# Altium PCB 主板-双BH(1).PcbDoc (part 1 of 13)
Units mm, origin at the board's own origin, x right, y up, seen from the top; angles counter-clockwise.
Board outline 97.69 x 103.45 mm, 2 copper layers (Top Layer, Bottom Layer); 78 components, 75 nets, 243 pads, 279 vias.
Unrouted connection lines stored in the file: 7.
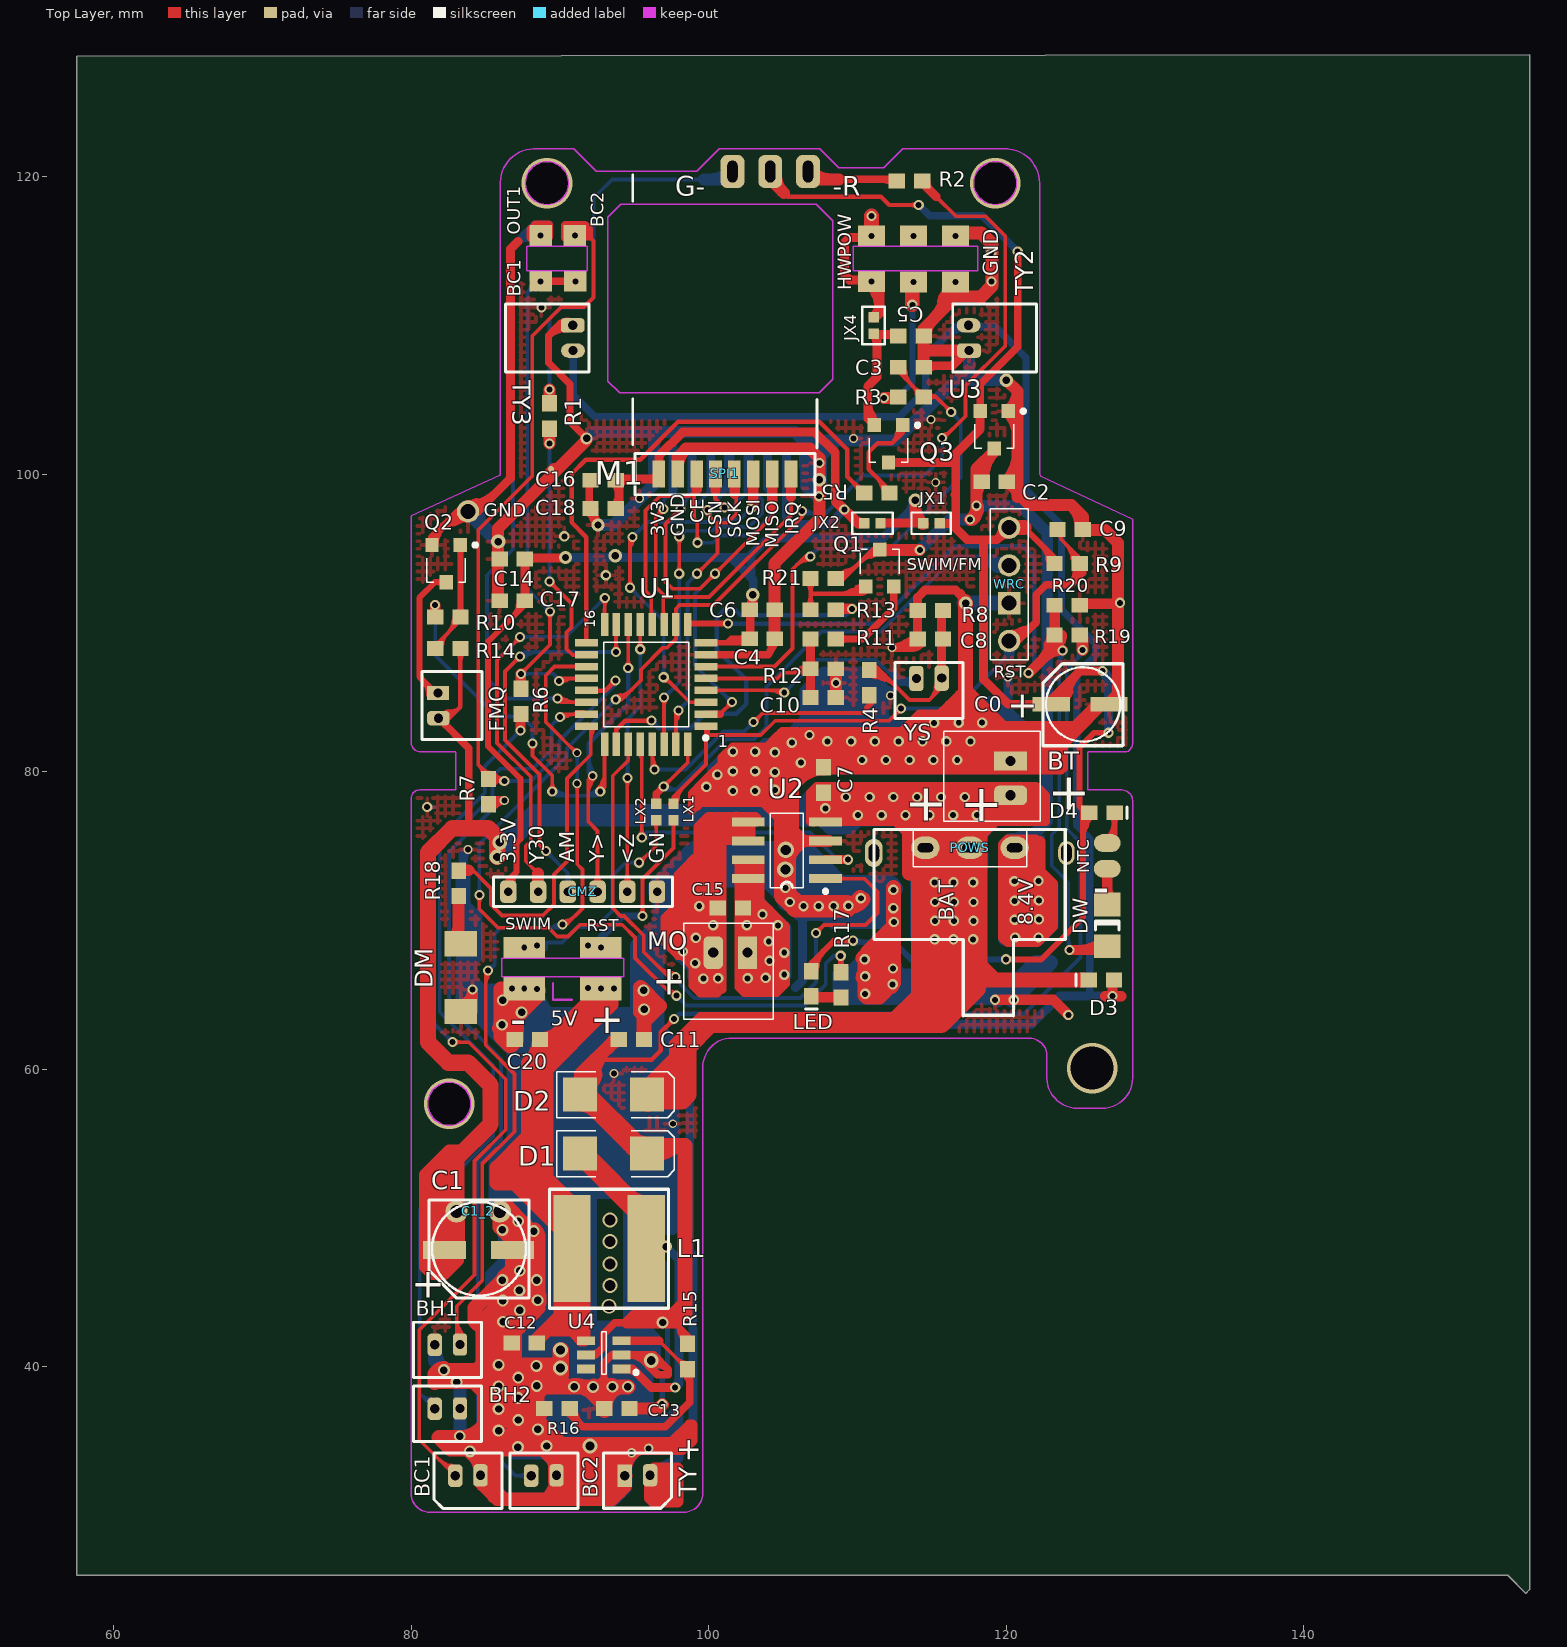
[diagram p0: Top Layer view]
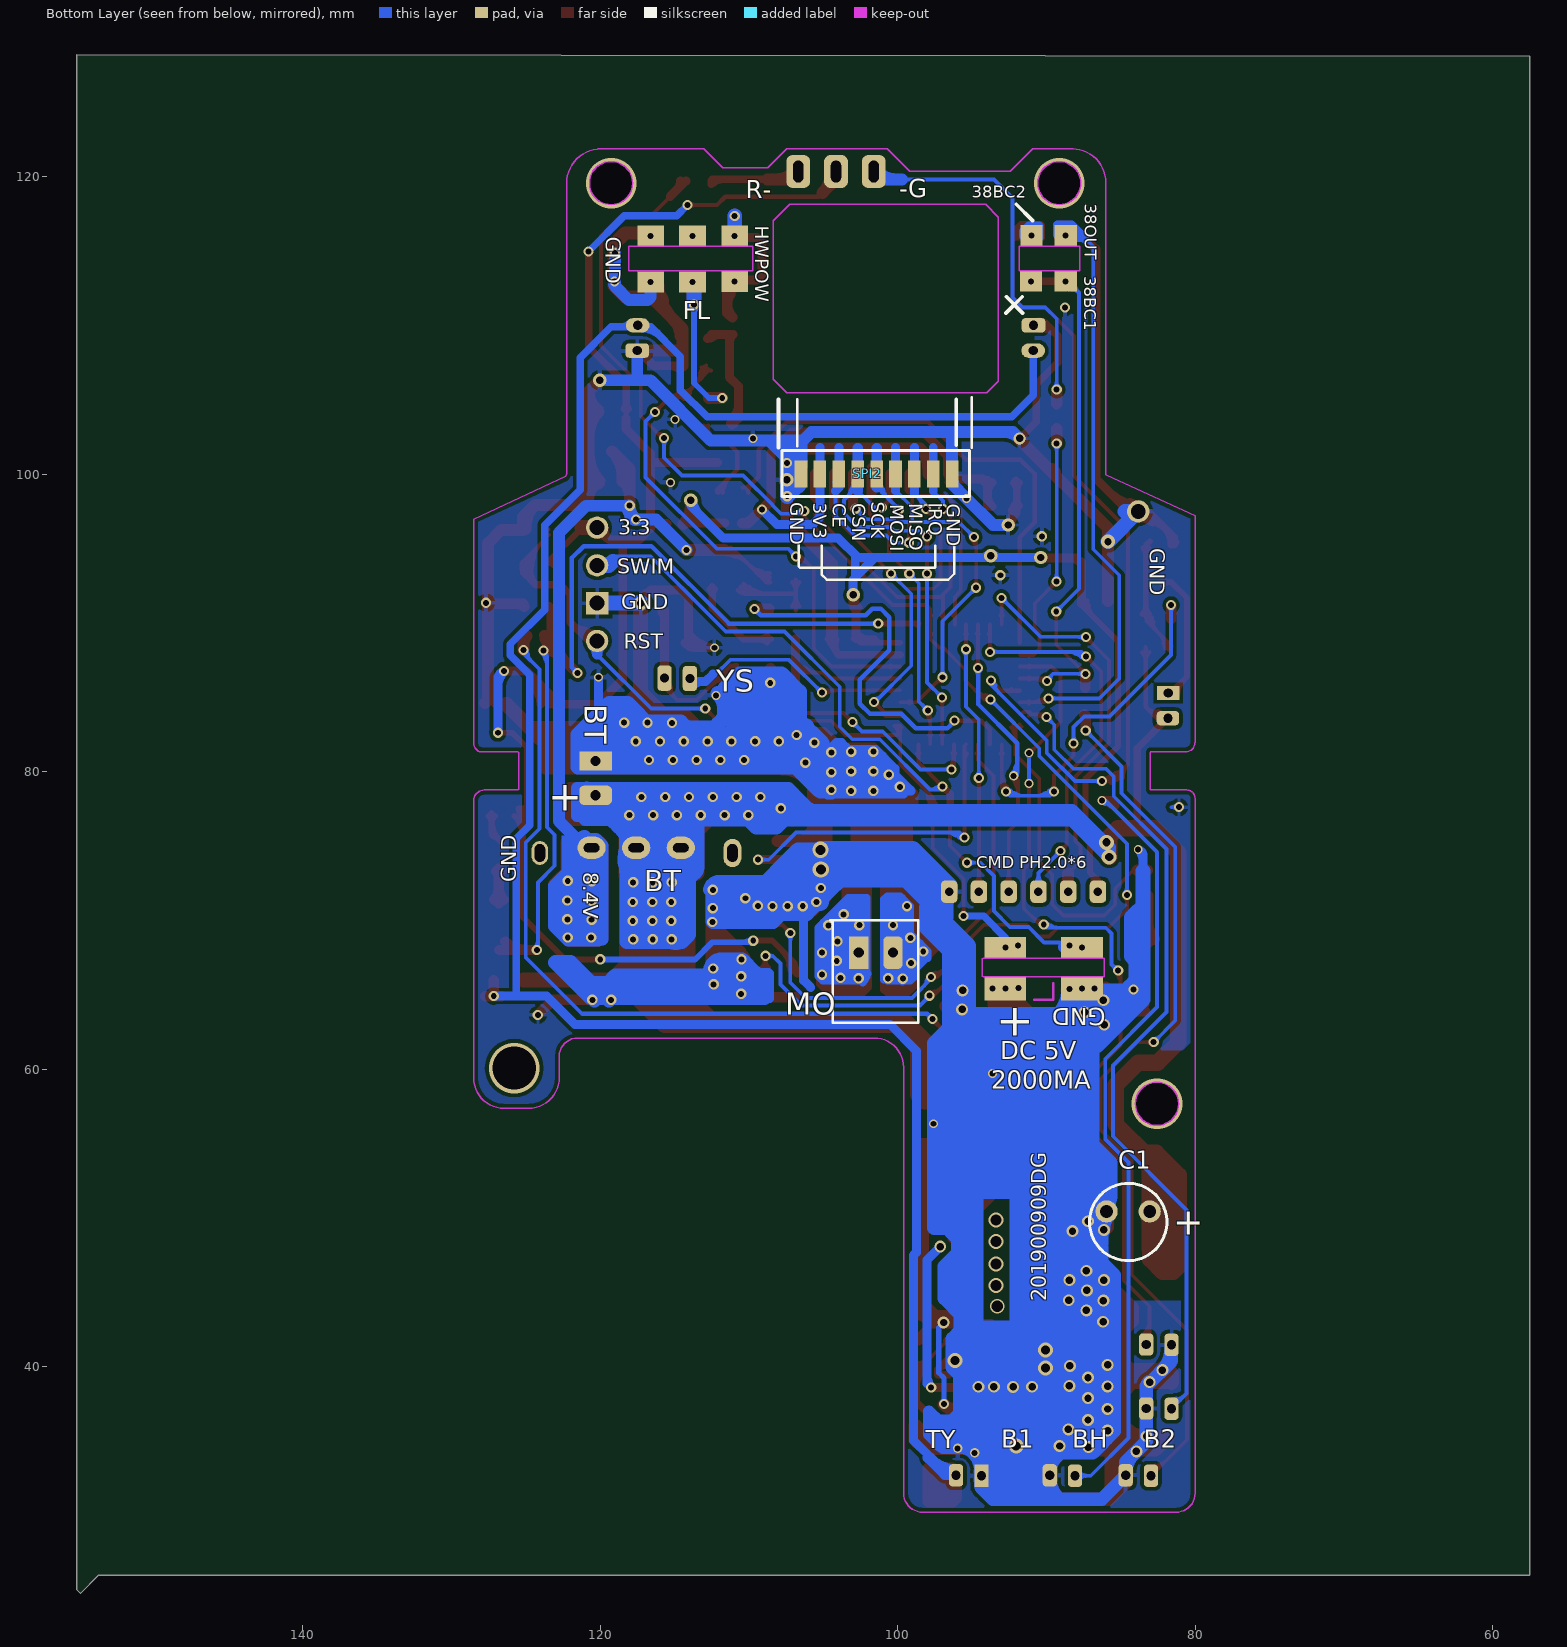
[diagram p1: Bottom Layer view, seen from below]

## Layer stack, top to bottom
Top Layer: signal copper 0.0356
Dielectric: dielectric 0.32, FR-4, Dk 4.8
Bottom Layer: signal copper 0.0356

## Board outline
57.506,128.118 57.506,25.984 153.721,25.984 154.94,24.765 155.194,25.019 155.194,128.219

## Design rules (kind name [scope] priority, off if disabled: settings)
Clearance [All] p1: gap=0.254
PolygonConnect [All] p1: connectstyle=Relief reliefconductorwidth=0.254 reliefentries=4 polygonreliefangle="90 Angle"
RoutingVias [All] p1: holewidth=0.711 width=1.27 viastyle="Through Hole" minholewidth=0.711 minwidth=1.27 maxholewidth=0.711 maxwidth=1.27
SilkscreenOverComponentPads [All] p1: minsilkscreentomaskgap=0.254
SolderMaskExpansion [All] p1: expansion=0.102
Width [All] p1: maxlimit=2 minlimit=0.254 preferedwidth=0.254 minimp=50.000000 maximp=50.000000 favimp=50.000000
27 further rules are at their usual default settings.

## Components (designator, comment, footprint, x,y, rotation, side; value= is the part's Value field where it differs from the comment)
BC1 "1.5*2P" MHDR1X2#1 84.5,32.7 r180 top locked (schematic designator BT)
BC2 "1.5*2P" MHDR1X2#1 89.6,32.7 r180 top locked (schematic designator BT)
BH1 "1.5*2P" MHDR1X2#1 83.12,41.5 r180 top locked (schematic designator BT)
BH2 "1.5*2P" MHDR1X2#1 83.12,37.2 r180 top locked (schematic designator BT)
BT "PH2.0-W" HDR1X2#1 120.3,78.032 r90 top locked
C0 "47uf  5*5.8" CC3216-1206#1 123.7,84.932 r0 top locked
C1 "220UF" CC3216-1206#2 85.3,47.39 r180 top locked
C1_2 "" HDR1X2#2 76.987,51 r180 top locked
C2 "0.1uf" CR1608-0603#1 119.2,99.5 r180 top locked
C3 "0.01uf" CR1608-0603#1 113.6,107.2 r180 top locked
C4 "0.1uf" CR1608-0603#1 103.6,88.951 r0 top locked (schematic designator C6)
C5 "10uf" CR1608-0603#1 113.6,109.3 r180 top locked (schematic designator C2)
C6 "0.01uf" CR1608-0603#1 103.6,90.9 r180 top locked (schematic designator C7)
C7 "0.1uf" CR1608-0603#1 107.723,79.45 r270 top locked (schematic designator C11)
C8 "0.01uf" CR1608-0603#1 114.9,88.932 r0 top locked
C9 "0.1uf" CR1608-0603#1 124.3,96.3 r180 top locked
C10 "0.01uf" CR1608-0603#1 107.7,85 r0 top locked (schematic designator R11)
C11 "10uf" CR1608-0603#1 94.8,62 r0 top locked
C12 "10uf" CR1608-0603#1 87.6,41.6 r180 top locked
C13 "1uf" CR1608-0603#1 93.83,37.2 r180 top locked
C14 "10uf" CR1608-0603#1 86.792,94.3 r180 top locked (schematic designator R6)
C15 "0.1uf" CR1608-0603#1 101.46,70.85 r0 top locked (schematic designator C4)
C16 "0.1uf" CR1608-0603#1 92.9,99.6 r0 top locked (schematic designator C4)
C17 "10uf" CR1608-0603#1 86.792,91.5 r180 top locked (schematic designator R6)
C18 "0.01uf" CR1608-0603#1 92.9,97.7 r0 top locked (schematic designator C4)
C20 "10uf" CR1608-0603#1 87.808,62 r0 top locked
CMZ "CMD PH2.0*6" MHDR1X7 94.15,71.944 r180 top locked
D1 "SS24" DSO-C2/X2.3 93.6,54.33 r0 top locked
D2 "SS24" DSO-C2/X2.3 93.6,58.3 r0 top locked (schematic designator D3)
D3 "SS14" CC1608-0603 126.4,66 r0 top locked (schematic designator D8)
D4 "SS14" CC1608-0603 126.441,77.25 r180 top locked (schematic designator R4)
DM "3*4*2小龟按钮" HDR1X2#3 85.344,70.032 r90 top locked (schematic designator FW)
DW "WD" CC3216-1206#3 126.8,69.672 r270 top locked
FMQ "1.5*2P" MHDR1X2#2 81.8,85.141 r270 top locked (schematic designator BT)
JX1 "" CR1005-0402 114.986,96.7 r0 top locked (schematic designator R8)
JX2 "" CR1005-0402 111,96.7 r180 top locked
JX4 "" CR1005-0402 111.1,110 r90 top locked (schematic designator R8)
L1 "22UH" L7 93.3,47.94 r180 top locked
LED "LED-DM" CC1608-0603 106.9,65.75 r90 top locked
LX1 "4.7K" CR1005-0402 97.638,77.292 r90 top locked (schematic designator R8)
LX2 "4.7K" CR1005-0402 96.469,77.292 r90 top locked (schematic designator R8)
MO "PH2.0-W" HDR1X2#4 103,67.843 r180 top locked (schematic designator BT)
POWS "SS12F23" HDR1X3 120.114,74.892 r180 top locked (schematic designator WS)
Q1 "S8050" SO-G3/C2.5 111.5,93.7 r0 top locked
Q2 "S8550" SO-G3/C2.5 82.35,94 r180 top locked
Q3 "S8550" SO-G3/C2.5 112.09,102.057 r180 top locked (schematic designator U5)
R1 "1K" CR1608-0603#1 89.3,103.919 r270 top locked
R2 "1K" CR1608-0603#1 113.5,119.732 r0 top locked
R3 "1K" CR1608-0603#1 113.6,105.2 r180 top locked
R4 "1K" CR1608-0603#1 110.8,86 r270 top locked
R5 "10K" CR1608-0603#1 111.303,98.755 r180 top locked (schematic designator R7)
R6 "500K" CR1608-0603#1 87.375,84.734 r270 top locked
R7 "500K" CR1608-0603#1 85.2,78.664 r90 top locked (schematic designator R6)
R8 "1M" CR1608-0603#1 114.9,90.856 r180 top locked
R9 "10K" CR1608-0603#1 124.1,94 r180 top locked
R10 "1K" CR1608-0603#2 82.46,90.4 r180 top locked (schematic designator R7)
R11 "1M" CR1608-0603#1 107.7,88.932 r180 top locked (schematic designator C10)
R12 "500K" CR1608-0603#1 107.7,86.932 r180 top locked
R13 "22K" CR1608-0603#1 107.7,90.9 r0 top locked
R14 "10K" CR1608-0603#2 82.46,88.3 r180 top locked (schematic designator R7)
R15 "100K" CR1608-0603#1 98.577,40.691 r270 top locked
R16 "7.89K" CR1608-0603#1 89.8,37.2 r180 top locked
R17 "1K" CR1608-0603#1 108.9,65.681 r90 top locked (schematic designator R19)
R18 "10K" CR1608-0603#1 83.2,72.5 r90 top locked
R19 "10K" CR1608-0603#1 124.1,89.2 r180 top locked (schematic designator R9)
R20 "4.7K" CR1608-0603#1 124.1,91.2 r180 top locked
R21 "22K" CR1608-0603#1 107.7,93 r180 top locked
SPI1 "SI24R1" MHDR1X8 105.537,100.032 r180 top locked
SPI2 "NRF24RL01" MHDR1X8 97.6,100.032 r0 bottom locked
TY "1.5*2P" MHDR1X2#3 95.9,32.7 r180 top locked (schematic designator BT)
TY2 "1.5*2P" MHDR1X2#4 117.475,109.855 r270 top locked (schematic designator BT)
TY3 "1.5*2P" MHDR1X2#4 90.881,108.483 r90 top locked (schematic designator BT)
U1 "STM8L151K4T6" TQFP32 95.8,85.877 r180 top locked
U2 "MX380（RZ7889D）" SO8 105.254,74.722 r90 top locked
U3 "ME6209-V1RK" SO-G3/C2.5 119.2,103 r180 top locked (schematic designator U5)
U4 "SX1308   B6287K  B6286" SOT23-6_M 92.95,40.8 r180 top locked
WRC "2.54HP" HDR1X4 120.2,88.8 r90 top locked (schematic designator SX)
YS "1.5*2P" MHDR1X2#5 115.5,86.3 r180 top locked (schematic designator BT)

## Footprints (in the part's own frame and the unit in brackets; to place one, negate y for a bottom-side part, rotate by r counter-clockwise, add the part's x,y. Pads: shape width x height; smd on the part's side, far side on the other; paste and mask are expansions set on the pad)
CC1608-0603 [mm] "Chip Capacito"
  rect 1.1x1 smd: 1(-0.85,0) 2(0.85,0)
  silkscreen extent -1.7,-0.4 -1.7,0.4
CC3216-1206#1 [mm]
  rect 2.5x1 smd: 1(-0.662,-0.386) 2(3.213,-0.386)
CC3216-1206#2 [mm]
  rect 2.9x1.2 smd: 1(-1.5,-0.45) 2(3.068,-0.455)
CC3216-1206#3 [mm] "Chip Capacitor; Body 3.2 x 1.6 mm (L"
  rect 1.6x1.8 smd: 1(-1.4,0) 2(1.4,0)
  silkscreen extent -0.3,-0.8 0.3,0.8
CR1005-0402 [mm]
  rect 0.7x0.7 smd: 1(-0.55,0) 2(0.55,0)
CR1608-0603#1 [mm]
  rect 1.1x1 smd: 1(-0.85,0) 2(0.85,0)
CR1608-0603#2 [mm]
  rect 1.1x1 smd: 1(-0.85,0)
  rect 1.1x1 smd paste+0: 2(0.85,0)
DSO-C2/X2.3 [mm] "DO-214-AA/SMB; 2 C-Bend Leads; Body 5.3 x 3.6 mm, inc. leads (LxW)"
  rect 2.3x2.3 smd: 1(-2.25,0) 2(2.25,0)
  silkscreen extent -3.8,-1.55 4.1,1.55
HDR1X2#1 [mm]
  rrect50% 1.3x2.2 hole 0.68: 1(0.39,0)
  rect 1.3x2.2 hole 0.68: 2(2.692,0.003)
  silkscreen extent -1.34,-1.99 4.68,4.49
HDR1X2#2 [mm] "Connector; Header; 2 Position"
  round 1.5 hole 0.86: 1(-8.963,0.558) 2(-6.063,0.558)
HDR1X2#3 [mm]
  rect 1.7x2.2 smd: 1(-6.147,2.004) 2(-1.6,2.004)
HDR1X2#4 [mm]
  rect 1.3x2.2 hole 0.68: 1(0.39,0)
  rrect50% 1.3x2.2 hole 0.68: 2(2.692,0.003)
  silkscreen extent -1.34,-1.99 4.68,4.49
HDR1X3 [mm]
  oval 1.9x1.5 hole 0.6 slot 1.05 at 0 deg: 1(-0.46,0) 2(2.54,0) 3(5.54,0)
  silkscreen extent -1.27,-1.27 6.35,1.27
HDR1X4 [mm]
  round 1.5 hole 1: 1(0,0) 3(5.08,0) 4(7.62,0)
  rect 1.5x1.5 hole 1: 2(2.54,0)
  silkscreen extent -1.27,-1.27 8.89,1.27
L7 [mm]
  rect 2.5x7.2 smd: 1(2.5,0) 2(-2.5,0)
  silkscreen extent -4,-4 4,4
MHDR1X2#1 [mm]
  rrect50% 0.96x1.5 hole 0.62: 1(-0.164,0) 2(1.536,0.026)
  silkscreen extent -1.61,-1.49 2.97,2.22
MHDR1X2#2 [mm]
  rect 0.96x1.5 hole 0.62: 1(-0.164,0)
  rrect50% 0.96x1.5 hole 0.62: 2(1.536,0.026)
  silkscreen extent -1.6,-1.07 2.97,2.97
MHDR1X2#3 [mm]
  rrect50% 0.96x1.5 hole 0.62: 1(-0.164,0)
  rect 0.96x1.5 hole 0.62: 2(1.536,0.026)
  silkscreen extent -1.6,-1.52 2.97,2.22
MHDR1X2#4 [mm]
  oval 0.96x1.6 hole 0.62: 1(-0.164,0)
  rrect50% 0.96x1.6 hole 0.62: 2(1.536,0.026)
  silkscreen extent -1.6,-1.07 2.97,4.55
MHDR1X2#5 [mm]
  rrect50% 0.96x1.7 hole 0.62: 1(-0.164,0) 2(1.536,0.026)
  silkscreen extent -1.6,-1.07 2.97,2.72
MHDR1X7 [mm] "Connector; Header; 7 Position"
  rrect50% 1.1x1.5 hole 0.58: 2(-2.38,0) 3(-0.38,0) 4(1.62,0) 5(3.62,0) 6(5.62,0) 7(7.62,0)
  silkscreen extent -3.41,-1 8.62,1
MHDR1X8 [mm] "Connector; Header; 8 Position"
  rect 0.85x1.8 smd: 1(0,0) 2(1.27,0) 3(2.54,0) 4(3.81,0) 5(5.08,0) 6(6.35,0) 7(7.62,0) 8(8.89,0)
  silkscreen extent -1.6,-1.37 10.49,1.4
SO8 [mm]
  rect 0.6x2.2 smd: 1(-1.905,-2.6) 2(-0.635,-2.6) 3(0.635,-2.6) 4(1.905,-2.6) 5(1.905,2.6) 6(0.635,2.6) 7(-0.635,2.6) 8(-1.905,2.6)
  silkscreen extent -2.88,-2.72 2.5,1.1
SO-G3/C2.5 [mm]
  rect 0.9x0.95 smd: 1(-0.95,-1.25) 2(0.95,-1.25) 3(0,1.25)
  silkscreen extent -1.3,-0.38 1.3,1.25
SOT23-6_M [mm]
  rect 1.2x0.59 smd: 1(-1.2,0.95) 2(-1.2,0) 3(-1.2,-0.95) 4(1.2,-0.95) 5(1.2,0) 6(1.2,0.95)
  silkscreen extent -2.29,-1.55 0.15,1.31
TQFP32 [mm] "QFP; 32 Leads; Body 7 x 7 mm; Pitch 0.8 mm"
  rect 1.55x0.5 smd: 1(-4.025,2.8) 2(-4.025,2) 3(-4.025,1.2) 4(-4.025,0.4) 5(-4.025,-0.4) 6(-4.025,-1.2) 7(-4.025,-2) 8(-4.025,-2.8) 18(4.025,-2) 19(4.025,-1.2) 20(4.025,-0.4) 21(4.025,0.4) 22(4.025,1.2) 23(4.025,2) 24(4.025,2.8)
  rect 0.5x1.55 smd: 9(-2.8,-4.025) 10(-2,-4.025) 11(-1.2,-4.025) 12(-0.4,-4.025) 13(0.4,-4.025) 14(1.2,-4.025) 15(2,-4.025) 16(2.8,-4.025) 26(2,4.025) 27(1.2,4.025) 28(0.4,4.025) 29(-0.4,4.025) 30(-1.2,4.025) 31(-2,4.025) 32(-2.8,4.025)
  rect 1.55x0.5 smd mask+0.102: 17(4.025,-2.8)
  rect 0.5x1.55 smd paste+0: 25(2.8,4.025)
  silkscreen extent -4.13,-2.85 2.85,3.72

## Part data
D3: library part "Cap Semi", "Capacitor (Sem"
DW: library part "Cap Semi"
LX2: library part Res3
U1: library part ST72F324K4T6

## Free pads (board coordinates)
  rect 2.8x1.6 hole 0.4: 0(87.6,65.432)
  rect 2.8x1.4 hole 0.4: 0(87.6,68.182) 0(92.75,68.182)
  rect 1.5x1.4 hole 0.4: 0(88.7,112.98) 0(88.7,116.053) 0(91,116.053) 0(91.032,112.98)
  round 0.4 smd: 0(89.408,100.355)
  rect 2.8x1.6 hole 0.4 mask+0.102: 0(92.75,65.432)
  rect 0.85x1.8 smd far side: 0(96.33,100.032)
  rrect50% 1.6x2.2 hole 0.68 slot 1.46 at 90 deg: 0(101.6,120.36) 0(104.14,120.36) 0(106.68,120.36)
  rect 1.8x1.4 hole 0.4: 0(110.95,112.956) 0(110.95,116.032) 0(113.78,112.932) 0(113.78,116.032) 0(116.6,112.932) 0(116.6,116.032)
  oval 1.2x1.9 hole 0.7 slot 1.2 at 90 deg: 3(111.103,74.545)
  round 1.5 hole 1 paste+0: 4(83.82,97.511)
  oval 1.1x1.6 hole 0.7 slot 1.2 at 90 deg: 4(124.051,74.545)
  oval 1.8x1.2 smd: 4(126.8,73.482) 4(126.8,75.209)

## Via types
v1: diameter 0.7, hole 0.4, Top Layer to Bottom Layer, 108 vias
v2: diameter 0.68, hole 0.4, Top Layer to Bottom Layer, 87 vias
v3: diameter 0.8, hole 0.5, Top Layer to Bottom Layer, tented both sides, 33 vias
v4: diameter 0.6, hole 0.4, Top Layer to Bottom Layer, 12 vias
v5: diameter 0.9, hole 0.5, Top Layer to Bottom Layer, 8 vias
v6: diameter 0.8, hole 0.5, Top Layer to Bottom Layer, 6 vias
v7: diameter 1, hole 0.75, Top Layer to Bottom Layer, tented both sides, 5 vias
v8: diameter 3.4, hole 2.9, Top Layer to Bottom Layer, 4 vias
v9: diameter 1, hole 0.6, Top Layer to Bottom Layer, tented both sides, 3 vias
v10: diameter 1, hole 0.56, Top Layer to Bottom Layer, tented both sides, 2 vias
v11: diameter 1.1, hole 0.68, Top Layer to Bottom Layer, 2 vias
v12: diameter 0.8, hole 0.4, Top Layer to Bottom Layer, 2 vias
v13: diameter 0.65, hole 0.4, Top Layer to Bottom Layer, tented both sides, 2 vias
v14: diameter 1, hole 0.6, Top Layer to Bottom Layer, tented bottom, 1 vias
v15: diameter 0.7, hole 0.4, Top Layer to Bottom Layer, tented bottom, 1 vias
v16: diameter 0.95, hole 0.5, Top Layer to Bottom Layer, 1 vias
v17: diameter 0.64, hole 0.4, Top Layer to Bottom Layer, 1 vias
v18: diameter 0.62, hole 0.4, Top Layer to Bottom Layer, 1 vias

## Nets (pads, with @x,y where several pads share a name; then routed paths per layer and width w, separated by ;. In a path a pad name is that pad's centre, name@x,y a point inside that pad or via, vN(x,y) a via of type N, cw(c..) or ccw(c..) an arc to the next point about the centre after c; other vN are vias at no path point)
1D-: D1.1 L1.2 U4.1 | length 32.2
  Top Layer w0.59: U4.1@94.2,39.85 94.897,39.85 96.139,38.608 v15@97.638,38.608 ; U4.1@94.455,39.85 cw(c94.455,38.783) 95.209,39.538 ; U4.1@94.455,39.85 cw(c94.455,38.783) 95.209,39.538 ; U4.1@94.455,39.85 cw(c94.455,38.783) 95.209,39.538
  Top Layer w0.8: L1.2@95.8,49.98 95.8,49.081 96.23,48.652 L1.2@96.23,49.476
  Top Layer w1.5: D1.1@91.35,54.43 L1.2@95.8,49.98 ; 94.417,51.363 ccw(c95.8,52.746) L1.2@95.8,50.79 ; 94.417,51.363 ccw(c95.8,52.746) L1.2@95.8,50.79 ; 94.417,51.363 ccw(c95.8,52.746) L1.2@95.8,50.79
  Bottom Layer w0.6: v3(97.13,48.082) 98.019,47.193 98.019,38.887 v15(97.739,38.608) ; v15@97.704,38.643 ccw(c96.944,39.403) 98.019,39.403 ; v15@97.704,38.643 ccw(c96.944,39.403) 98.019,39.403 ; v15@97.704,38.643 ccw(c96.944,39.403) 98.019,39.403
1R-1: R15.2 R16.1 U4.3 | length 30.9
  Top Layer w0.254: 96.655,41.75 R15.2@98.564,39.841 ; 97.832,40.573 ccw(c98.577,41.318) R15.2@98.577,40.264 ; 97.832,40.573 ccw(c98.577,41.318) R15.2@98.577,40.264 ; 97.832,40.573 ccw(c98.577,41.318) R15.2@98.577,40.264 ; 97.986,40.419 cw(c97.458,39.891) R15.2@98.204,39.891 ; 97.986,40.419 cw(c97.458,39.891) R15.2@98.204,39.891 ; 97.986,40.419 cw(c97.458,39.891) R15.2@98.204,39.891 ; R15.2@98.295,40.34 cw(c98.144,39.776) R15.2@98.708,39.925 ; R15.2@98.295,40.34 cw(c98.144,39.776) R15.2@98.708,39.925 ; R15.2@98.295,40.34 cw(c98.144,39.776) R15.2@98.708,39.925
  Top Layer w0.5: R16.1@90.85,37.2 90.673,37.023 90.673,36.809 91.516,35.966 97.079,35.966 98.73,37.617 R15.2@98.73,39.841 ; R16.1@90.95,37.2 ccw(c92.561,37.2) 91.422,36.061 ; R16.1@90.95,37.2 ccw(c92.561,37.2) 91.422,36.061 ; R16.1@90.95,37.2 ccw(c92.561,37.2) 91.422,36.061 ; R15.2@98.401,39.614 cw(c97.606,38.82) 98.73,38.82 ; R15.2@98.401,39.614 cw(c97.606,38.82) 98.73,38.82 ; R15.2@98.401,39.614 cw(c97.606,38.82) 98.73,38.82 ; 98.622,39.231 cw(c98.845,39.36) R15.2@98.709,39.578 ; 98.622,39.231 cw(c98.845,39.36) R15.2@98.709,39.578 ; 98.622,39.231 cw(c98.845,39.36) R15.2@98.709,39.578
  Top Layer w0.59: U4.3@94.15,41.75 96.655,41.75 ; R15.2@98.564,39.841 R15.2@98.73,39.841
3-BH: 
3-WZ: 
3.3V: C0.1 C4.1 C6.2 C14.1 C16.2 C17.1 C18.2 CMZ.7 D4.2 JX1.1 JX1.2 JX2.1 JX2.2 LED.2 pad.0@104.14,120.36 Q3.3 R9.2 SPI1.8 SPI2.7 U1.8 U3.2 WRC.4 | length 343.1
  Top Layer w0.254: v2@126.721,82.626 126.873,82.474 v2(126.873,82.626)
  Top Layer w0.3: 105.054,118.923 105.308,118.669 111.582,118.669 112.141,118.11 v2(114.122,118.11) ; 113.664,118.11 ccw(c113.664,118.569) v2@113.988,118.244 ; 113.664,118.11 cw(c113.664,117.651) v2@113.988,117.976 ; 113.664,118.11 ccw(c113.664,118.569) v2@113.988,118.244 ; 113.664,118.11 cw(c113.664,117.651) v2@113.988,117.976 ; 113.664,118.11 ccw(c113.664,118.569) v2@113.988,118.244 ; 113.664,118.11 cw(c113.664,117.651) v2@113.988,117.976
  Top Layer w0.4: CMZ.7@86.53,71.944 86.53,72.712 ; C17.1@87.642,91.5 87.642,91.223 85.166,88.748 85.166,81.728 87.351,79.544 87.351,75.489 87.071,75.209 87.071,73.254 ; C16.2@93.966,99.593 94.056,99.593 C16.2@94.158,99.492 ; SPI1.8@96.647,99.746 SPI1.8@96.647,100.032 ; U1.8@99.825,88.677 100.711,88.677 ; C4.1@102.667,88.873 102.472,88.677 100.711,88.677 ; C4.1@102.95,88.951 101.518,88.951 101.244,88.677 100.711,88.677 ; LED.2@106.913,66.587 106.913,67.136 108.433,68.656 v1(109.703,68.656) ; v1(119.99,67.386) 122.352,67.386 125.171,70.206 125.171,77.445 124.917,77.699 ; 121.207,96.42 R9.2@123.539,94.089 ; v2@126.721,82.626 125.908,82.626 124.917,81.636 124.917,77.699 ; CMZ.7@86.372,72.456 ccw(c86.243,72.712) 86.53,72.712 ; CMZ.7@86.372,72.456 ccw(c86.243,72.712) 86.53,72.712 ; CMZ.7@86.372,72.456 ccw(c86.243,72.712) 86.53,72.712 ; CMZ.7@86.483,72.126 cw(c87.092,72.355) 86.632,72.815 ; CMZ.7@86.483,72.126 cw(c87.092,72.355) 86.632,72.815 ; CMZ.7@86.483,72.126 cw(c87.092,72.355) 86.632,72.815 ; 86.53,72.712 ccw(c86.817,72.712) CMZ.7@86.688,72.456 ; 86.53,72.712 ccw(c86.817,72.712) CMZ.7@86.688,72.456 ; 86.53,72.712 ccw(c86.817,72.712) CMZ.7@86.688,72.456 ; 86.53,72.712 87.071,73.254 ; CMZ.7@86.557,72.102 ccw(c86.233,72.595) CMZ.7@86.82,72.652 ; CMZ.7@86.557,72.102 ccw(c86.233,72.595) CMZ.7@86.82,72.652 ; CMZ.7@86.557,72.102 ccw(c86.233,72.595) CMZ.7@86.82,72.652 ; 86.849,90.43 ccw(c85.779,91.5) C17.1@87.292,91.5 ; 86.849,90.43 ccw(c85.779,91.5) C17.1@87.292,91.5 ; 86.849,90.43 ccw(c85.779,91.5) C17.1@87.292,91.5 ; CMZ.7@86.858,72.267 cw(c87.73,72.594) 87.071,73.254 ; CMZ.7@86.858,72.267 cw(c87.73,72.594) 87.071,73.254 ; CMZ.7@86.858,72.267 cw(c87.73,72.594) 87.071,73.254 ; C17.1@87.198,91.151 cw(c87.876,90.97) C17.1@87.545,91.588 ; C17.1@87.198,91.151 cw(c87.876,90.97) C17.1@87.545,91.588 ; C17.1@87.198,91.151 cw(c87.876,90.97) C17.1@87.545,91.588 ; 101.316,88.677 ccw(c101.316,90.335) C4.1@102.488,89.163 ; 101.316,88.677 ccw(c101.316,90.335) C4.1@102.488,89.163 ; 101.316,88.677 ccw(c101.316,90.335) C4.1@102.488,89.163 ; 101.89,88.818 cw(c102.138,88.389) C4.1@102.488,88.739 ; 101.89,88.818 cw(c102.138,88.389) C4.1@102.488,88.739 ; 101.89,88.818 cw(c102.138,88.389) C4.1@102.488,88.739 ; 101.976,88.951 ccw(c101.976,89.675) C4.1@102.488,89.163 ; 101.976,88.951 cw(c101.976,88.227) C4.1@102.488,88.739 ; 101.976,88.951 ccw(c101.976,89.675) C4.1@102.488,89.163 ; 101.976,88.951 cw(c101.976,88.227) C4.1@102.488,88.739 ; 101.976,88.951 ccw(c101.976,89.675) C4.1@102.488,89.163 ; 101.976,88.951 cw(c101.976,88.227) C4.1@102.488,88.739 ; LED.2@106.8,66.65 cw(c107.702,66.65) 107.064,67.288 ; LED.2@106.8,66.65 cw(c107.702,66.65) 107.064,67.288 ; LED.2@106.8,66.65 cw(c107.702,66.65) 107.064,67.288 ; LED.2@106.95,66.563 ccw(c106.576,67.211) LED.2@107.298,67.018 ; LED.2@106.95,66.563 ccw(c106.576,67.211) LED.2@107.298,67.018 ; LED.2@106.95,66.563 ccw(c106.576,67.211) LED.2@107.298,67.018 ; LED.2@107.2,66.65 cw(c109.068,66.65) 107.747,67.971 ; LED.2@107.2,66.65 cw(c109.068,66.65) 107.747,67.971 ; LED.2@107.2,66.65 cw(c109.068,66.65) 107.747,67.971 ; 109.34,68.656 ccw(c109.34,69.018) v1@109.597,68.762 ; 109.34,68.656 cw(c109.34,68.294) v1@109.597,68.55 ; 109.34,68.656 ccw(c109.34,69.018) v1@109.597,68.762 ; 109.34,68.656 cw(c109.34,68.294) v1@109.597,68.55 ; 109.34,68.656 ccw(c109.34,69.018) v1@109.597,68.762 ; 109.34,68.656 cw(c109.34,68.294) v1@109.597,68.55 ; v1@120.096,67.28 cw(c120.352,67.024) 120.352,67.386 ; v1@120.096,67.28 cw(c120.352,67.024) 120.352,67.386 ; v1@120.096,67.28 cw(c120.352,67.024) 120.352,67.386 ; v1@120.096,67.492 ccw(c120.352,67.748) 120.352,67.386 ; v1@120.096,67.492 ccw(c120.352,67.748) 120.352,67.386 ; v1@120.096,67.492 ccw(c120.352,67.748) 120.352,67.386 ; 122.386,95.241 cw(c121.144,94) R9.2@122.9,94 ; 122.386,95.241 cw(c121.144,94) R9.2@122.9,94 ; 122.386,95.241 cw(c121.144,94) R9.2@122.9,94 ; R9.2@122.802,94.368 ccw(c123.524,94.561) R9.2@123.15,93.913 ; R9.2@122.802,94.368 ccw(c123.524,94.561) R9.2@123.15,93.913 ; R9.2@122.802,94.368 ccw(c123.524,94.561) R9.2@123.15,93.913 ; 123.069,94.559 cw(c122.51,94) R9.2@123.3,94 ; 123.069,94.559 cw(c122.51,94) R9.2@123.3,94 ; 123.069,94.559 cw(c122.51,94) R9.2@123.3,94 ; 124.917,77.699 ccw(c125.335,78.116) D4.2@125.472,77.542 ; 124.917,77.699 ccw(c125.335,78.116) D4.2@125.472,77.542 ; 124.917,77.699 ccw(c125.335,78.116) D4.2@125.472,77.542 ; 125.171,75.632 cw(c127.159,75.632) D4.2@125.753,77.038 ; 125.171,75.632 cw(c127.159,75.632) D4.2@125.753,77.038 ; 125.171,75.632 cw(c127.159,75.632) D4.2@125.753,77.038 ; 125.171,76.598 cw(c126.193,76.598) D4.2@125.47,77.321 ; 125.171,76.598 cw(c126.193,76.598) D4.2@125.47,77.321 ; 125.171,76.598 cw(c126.193,76.598) D4.2@125.47,77.321 ; D4.2@125.293,77.081 cw(c124.679,76.663) 125.323,76.292 ; D4.2@125.293,77.081 cw(c124.679,76.663) 125.323,76.292 ; D4.2@125.293,77.081 cw(c124.679,76.663) 125.323,76.292
  Top Layer w0.5: LED.2@106.756,66.431 LED.2@106.913,66.587 ; U3.2@118.25,104.25 118.25,106.055 120.777,108.582 v2(120.777,114.986) ; U3.2@118.109,104.416 ccw(c117.767,104.758) 118.25,104.758 ; U3.2@118.109,104.416 ccw(c117.767,104.758) 118.25,104.758 ; U3.2@118.109,104.416 ccw(c117.767,104.758) 118.25,104.758 ; 118.25,104.758 ccw(c118.733,104.758) U3.2@118.391,104.416 ; 118.25,104.758 ccw(c118.733,104.758) U3.2@118.391,104.416 ; 118.25,104.758 ccw(c118.733,104.758) U3.2@118.391,104.416
  Top Layer w0.6: C17.1@87.642,91.3 C14.1@87.642,94.1 ; C14.1@87.928,94.386 v5@90.348,94.386 ; C18.2@93.966,97.866 C16.2@93.966,99.593 ; C16.2@94.158,99.492 94.361,99.695 ; C4.1@102.794,88.949 C6.2@102.794,91.008 ; v5@102.997,91.897 102.997,91.211 C6.2@102.794,91.008 ; 108.56,98.247 108.509,98.298 108.509,101.473 107.137,102.845 98.252,102.845 96.647,101.239 SPI1.8@96.647,100.032 96.31,99.695 94.361,99.695 ; JX2.1@111.608,96.725 JX1.1@114.436,96.725 ; Q3.3@112.09,100.807 116.591,100.807 ; JX1.2@115.494,96.695 116.611,96.695 ; 116.561,98.628 116.611,98.577 ; 118.25,103.75 118.25,103.035 116.611,101.397 116.611,98.577 ; 118.339,95.606 118.478,95.466 118.478,86.22 120.153,84.546 C0.1@123.038,84.546 ; WRC.4@120.2,96.42 119.386,95.606 117.373,95.606 116.611,96.368 116.611,98.577 ; C0.1@123.138,84.546 C0.1@123.038,84.546 ; C0.1@123.978,84.607 cw(c124.476,84.768) 124.106,85.137 ; v2(126.467,86.792) 124.968,86.792 123.038,84.862 C0.1@123.038,84.546 ; C14.1@87.833,94.159 cw(c88.383,93.609) 88.383,94.386 ; C14.1@87.833,94.159 cw(c88.383,93.609) 88.383,94.386 ; C14.1@87.833,94.159 cw(c88.383,93.609) 88.383,94.386 ; C18.2@93.659,97.841 ccw(c92.915,98.585) 93.966,98.585 ; C18.2@93.659,97.841 ccw(c92.915,98.585) 93.966,98.585 ; C18.2@93.659,97.841 ccw(c92.915,98.585) 93.966,98.585 ; C16.2@93.659,99.459 cw(c92.915,98.715) 93.966,98.715 ; C16.2@93.659,99.459 cw(c92.915,98.715) 93.966,98.715 ; C16.2@93.659,99.459 cw(c92.915,98.715) 93.966,98.715 ; C16.2@93.941,99.459 cw(c94.512,98.888) 94.512,99.695 ; C16.2@93.941,99.459 cw(c94.512,98.888) 94.512,99.695 ; C16.2@93.941,99.459 cw(c94.512,98.888) 94.512,99.695 ; C16.2@93.965,99.487 cw(c94.361,99.214) 94.361,99.695 ; C16.2@93.965,99.487 cw(c94.361,99.214) 94.361,99.695 ; C16.2@93.965,99.487 cw(c94.361,99.214) 94.361,99.695 ; 96.012,99.695 cw(c96.012,98.921) SPI1.8@96.559,99.468 ; 96.012,99.695 cw(c96.012,98.921) SPI1.8@96.559,99.468 ; 96.012,99.695 cw(c96.012,98.921) SPI1.8@96.559,99.468 ; C6.2@102.659,91.041 ccw(c101.842,91.858) v5@102.997,91.858 ; C6.2@102.659,91.041 ccw(c101.842,91.858) v5@102.997,91.858 ; C6.2@102.659,91.041 ccw(c101.842,91.858) v5@102.997,91.858 ; C6.2@102.794,91.008 ccw(c102.361,91.441) v5@102.851,91.807 ; C6.2@102.794,91.008 ccw(c102.361,91.441) v5@102.851,91.807 ; C6.2@102.794,91.008 ccw(c102.361,91.441) v5@102.851,91.807 ; v5@102.842,91.822 cw(c102.395,91.564) 102.893,91.431 ; v5@102.842,91.822 cw(c102.395,91.564) 102.893,91.431 ; v5@102.842,91.822 cw(c102.395,91.564) 102.893,91.431 ; v5@102.842,91.822 cw(c102.395,91.564) 102.893,91.431 ; v5@102.902,91.463 ccw(c103.218,91.28) C6.2@102.948,91.035 ; v5@102.902,91.463 ccw(c103.218,91.28) C6.2@102.948,91.035 ; v5@102.902,91.463 ccw(c103.218,91.28) C6.2@102.948,91.035 ; 119.432,95.652 ccw(c118.664,96.42) WRC.4@119.75,96.42 ; 119.432,95.652 cw(c120.2,94.884) WRC.4@120.2,95.97 ; 119.432,95.652 ccw(c118.664,96.42) WRC.4@119.75,96.42 ; 119.432,95.652 cw(c120.2,94.884) WRC.4@120.2,95.97 ; 119.432,95.652 ccw(c118.664,96.42) WRC.4@119.75,96.42 ; 119.432,95.652 cw(c120.2,94.884) WRC.4@120.2,95.97 ; C0.1@122.788,84.546 cw(c122.947,84.546) C0.1@122.835,84.658 ; C0.1@122.788,84.546 cw(c122.947,84.546) C0.1@122.835,84.658 ; C0.1@122.788,84.546 cw(c122.947,84.546) C0.1@122.835,84.658 ; C0.1@123.388,84.546 cw(c124.996,84.546) 123.859,85.683 ; C0.1@123.388,84.546 cw(c124.996,84.546) 123.859,85.683 ; C0.1@123.388,84.546 cw(c124.996,84.546) 123.859,85.683 ; C0.1@123.688,84.719 ccw(c123.117,85.708) 124.22,85.413 ; C0.1@123.688,84.719 ccw(c123.117,85.708) 124.22,85.413 ; C0.1@123.688,84.719 ccw(c123.117,85.708) 124.22,85.413 ; C0.1@123.988,84.546 cw(c127.044,84.546) 124.883,86.707 ; C0.1@123.988,84.546 cw(c127.044,84.546) 124.883,86.707 ; C0.1@123.988,84.546 cw(c127.044,84.546) 124.883,86.707
  Top Layer w0.7: 108.56,98.247 108.56,98.196 110.056,96.7 JX2.2@110.449,96.7 ; 109.778,96.978 ccw(c110.449,97.649) JX2.2@110.449,96.7 ; 109.778,96.978 ccw(c110.449,97.649) JX2.2@110.449,96.7 ; 109.778,96.978 ccw(c110.449,97.649) JX2.2@110.449,96.7
  Top Layer w0.8: pad.0@104.14,120.36 104.14,119.837 105.054,118.923 ; 113.894,96.876 v5(113.894,98.247) ; pad.0@104.54,120.06 ccw(c106.044,120.06) 104.98,118.997 ; pad.0@104.54,120.06 ccw(c106.044,120.06) 104.98,118.997 ; pad.0@104.54,120.06 ccw(c106.044,120.06) 104.98,118.997 ; v5@113.894,97.888 ccw(c115.623,97.888) JX1.1@114.4,96.665 ; v5@113.894,97.888 ccw(c115.623,97.888) JX1.1@114.4,96.665 ; v5@113.894,97.888 ccw(c115.623,97.888) JX1.1@114.4,96.665
  Top Layer w1: WRC.4@120.2,96.42 121.207,96.42
  Bottom Layer w0.4: v1@109.818,68.541 112.459,68.541 113.614,67.386 v1(119.99,67.386) ; v1@109.809,68.762 ccw(c110.342,69.296) 110.342,68.541 ; v1@109.809,68.762 ccw(c110.342,69.296) 110.342,68.541 ; v1@109.809,68.762 ccw(c110.342,69.296) 110.342,68.541 ; 119.627,67.386 ccw(c119.627,67.748) v1@119.884,67.492 ; 119.627,67.386 cw(c119.627,67.024) v1@119.884,67.28 ; 119.627,67.386 ccw(c119.627,67.748) v1@119.884,67.492 ; 119.627,67.386 cw(c119.627,67.024) v1@119.884,67.28 ; 119.627,67.386 ccw(c119.627,67.748) v1@119.884,67.492 ; 119.627,67.386 cw(c119.627,67.024) v1@119.884,67.28
  Bottom Layer w0.5: v1(109.703,68.656) v1@109.818,68.541 ; v2(114.122,118.11) 114.859,117.373 118.389,117.373 v2(120.777,114.986)
  Bottom Layer w0.6: v5(90.373,94.412) 101.498,94.412 ; 102.692,94.412 103.988,95.707 111.709,95.707 113.894,97.892 v5(113.894,98.247) ; 102.845,93.167 102.845,94.412 101.498,94.412 ; v5(102.972,91.897) 102.997,91.923 102.997,92.913 101.498,94.412 ; 105.22,101.803 105.22,97.116 105.694,96.642 108.123,96.642 v2(109.118,97.638) ; WRC.4@120.2,96.42 WRC.4@120.2,96.716 ; v2(126.467,86.792) 126.873,86.385 v2(126.873,82.626) ; 93.057,94.412 ccw(c93.057,95.208) v5@93.62,94.645 ; 93.057,94.412 ccw(c93.057,95.208) v5@93.62,94.645 ; 93.057,94.412 ccw(c93.057,95.208) v5@93.62,94.645 ; v5@93.832,94.645 ccw(c94.395,95.208) 94.395,94.412 ; v5@93.832,94.645 ccw(c94.395,95.208) 94.395,94.412 ; v5@93.832,94.645 ccw(c94.395,95.208) 94.395,94.412 ; 113.386,97.384 ccw(c112.523,98.247) v5@113.744,98.247 ; 113.386,97.384 ccw(c112.523,98.247) v5@113.744,98.247 ; 113.386,97.384 ccw(c112.523,98.247) v5@113.744,98.247 ; 113.569,97.597 cw(c114.397,97.375) v5@113.969,98.117 ; 113.569,97.597 cw(c114.397,97.375) v5@113.969,98.117 ; 113.569,97.597 cw(c114.397,97.375) v5@113.969,98.117 ; v2@126.438,86.764 cw(c125.389,85.714) 126.873,85.714 ; v2@126.438,86.764 cw(c125.389,85.714) 126.873,85.714 ; v2@126.438,86.764 cw(c125.389,85.714) 126.873,85.714 ; v2@126.457,86.753 cw(c126.32,86.217) 126.873,86.217 ; v2@126.457,86.753 cw(c126.32,86.217) 126.873,86.217 ; v2@126.457,86.753 cw(c126.32,86.217) 126.873,86.217
  other v5: 93.726,94.539
3V3: 
5V: C12.1 C20.2 L1.1 pad.0@92.75,65.432 U4.4 | length 236.3
  Top Layer w0.4: U4.4@91.498,41.75 91.318,41.826 U4.4@91.75,41.75
  Top Layer w0.7: L1.1@90.805,45.263 91.059,45.009 91.059,42.189 U4.4@91.389,41.859 ; 90.856,42.393 88.849,42.393 ; C12.1@88.425,41.73 ccw(c87.997,42.472) 88.824,42.25 ; C12.1@88.425,41.73 ccw(c87.997,42.472) 88.824,42.25 ; C12.1@88.425,41.73 ccw(c87.997,42.472) 88.824,42.25 ; C12.1@88.645,41.638 cw(c89.404,41.838) 88.849,42.393 ; C12.1@88.645,41.638 cw(c89.404,41.838) 88.849,42.393 ; C12.1@88.645,41.638 cw(c89.404,41.838) 88.849,42.393 ; C12.1@88.645,41.638 cw(c89.404,41.838) 88.849,42.393 ; C12.1@88.645,41.638 cw(c89.404,41.838) 88.849,42.393 ; C12.1@88.645,41.638 cw(c89.404,41.838) 88.849,42.393 ; C12.1@88.65,41.6 cw(c90.082,41.6) 89.07,42.613 ; C12.1@88.65,41.6 cw(c90.082,41.6) 89.07,42.613 ; C12.1@88.65,41.6 cw(c90.082,41.6) 89.07,42.613 ; 88.849,42.393 88.45,41.993 C12.1@88.45,41.6 90.272,43.422 90.272,43.815 89.954,43.497 88.849,42.393 ; L1.1@90.164,44.954 cw(c88.003,42.792) 91.059,42.792 ; L1.1@90.164,44.954 cw(c88.003,42.792) 91.059,42.792 ; L1.1@90.164,44.954 cw(c88.003,42.792) 91.059,42.792 ; 91.059,42.549 ccw(c92.244,42.549) U4.4@91.406,41.711 ; 91.059,42.549 ccw(c92.244,42.549) U4.4@91.406,41.711 ; 91.059,42.549 ccw(c92.244,42.549) U4.4@91.406,41.711 ; 91.059,44.042 cw(c92.348,44.042) L1.1@91.437,44.954 ; 91.059,44.042 cw(c92.348,44.042) L1.1@91.437,44.954 ; 91.059,44.042 cw(c92.348,44.042) L1.1@91.437,44.954
  Top Layer w0.8: 88.519,52.349 88.519,53.264 ; 89.954,43.497 89.954,47.094 L1.1@90.8,47.94 ; 90.272,43.815 90.272,45.263 L1.1@90.8,47.94 ; 90.856,42.393 U4.4@91.389,41.859 ; L1.1@91.389,47.351 L1.1@90.8,47.94 ; U4.4@91.65,41.859 L1.1@91.65,47.351 ; 88.519,53.264 88.519,56.325 88.557,56.363 88.557,53.302 88.519,53.264 ; 88.849,51.664 ccw(c90.246,53.06) L1.1@90.633,51.124 ; 88.849,51.664 ccw(c90.246,53.06) L1.1@90.633,51.124 ; 88.849,51.664 ccw(c90.246,53.06) L1.1@90.633,51.124 ; 88.849,51.664 90.8,49.713 90.8,48.519 L1.1@90.8,47.94 ; 89.954,43.333 cw(c91.454,43.333) L1.1@91.037,44.774 ; 89.954,43.333 cw(c91.454,43.333) L1.1@91.037,44.774 ; 89.954,43.333 cw(c91.454,43.333) L1.1@91.037,44.774 ; L1.1@89.954,44.398 cw(c91.146,44.398) L1.1@90.814,45.542 ; L1.1@89.954,44.398 cw(c91.146,44.398) L1.1@90.814,45.542 ; L1.1@89.954,44.398 cw(c91.146,44.398) L1.1@90.814,45.542 ; L1.1@90.23,44.959 cw(c87.344,41.764) U4.4@91.65,41.764 ; L1.1@90.23,44.959 cw(c87.344,41.764) U4.4@91.65,41.764 ; L1.1@90.23,44.959 cw(c87.344,41.764) U4.4@91.65,41.764 ; 90.272,43.738 cw(c91.355,43.738) L1.1@91.044,44.776 ; 90.272,43.738 cw(c91.355,43.738) L1.1@91.044,44.776 ; 90.272,43.738 cw(c91.355,43.738) L1.1@91.044,44.776 ; 90.7,44.234 cw(c91.59,44.81) L1.1@90.836,45.555 ; 90.7,44.234 cw(c91.59,44.81) L1.1@90.836,45.555 ; 90.7,44.234 cw(c91.59,44.81) L1.1@90.836,45.555 ; L1.1@90.767,45.553 cw(c88.97,43.565) 91.65,43.565 ; L1.1@90.767,45.553 cw(c88.97,43.565) 91.65,43.565 ; L1.1@90.767,45.553 cw(c88.97,43.565) 91.65,43.565 ; 91.241,43.398 cw(c92.316,44.093) L1.1@91.405,44.993 ; 91.241,43.398 cw(c92.316,44.093) L1.1@91.405,44.993 ; 91.241,43.398 cw(c92.316,44.093) L1.1@91.405,44.993
  Top Layer w1: 87.884,55.499 85.776,53.391 85.776,52.349 86.97,52.349 ; 88.849,51.664 87.884,51.664 87.884,60.427 91.948,64.491 pad.0@91.948,64.846 ; 88.925,59.868 92.75,63.692 ; 88.925,60.833 pad.0@92.75,64.658 ; L1.1@90.8,48.519 86.97,52.349 ; L1.1@90.8,49.713 90.8,50.957 89.052,52.705 ; 86.97,52.349 ccw(c90.21,55.589) L1.1@90.717,51.035 ; 86.97,52.349 ccw(c90.21,55.589) L1.1@90.717,51.035 ; 86.97,52.349 ccw(c90.21,55.589) L1.1@90.717,51.035 ; 88.007,60.55 ccw(c86.557,62) C20.2@88.608,62 ; 88.007,60.55 ccw(c86.557,62) C20.2@88.608,62 ; 88.007,60.55 ccw(c86.557,62) C20.2@88.608,62 ; 88.44,50.879 ccw(c90.505,52.943) L1.1@90.828,50.042 ; 88.44,50.879 ccw(c90.505,52.943) L1.1@90.828,50.042 ; 88.44,50.879 ccw(c90.505,52.943) L1.1@90.828,50.042 ; C20.2@88.708,62 ccw(c88.708,63.81) 89.987,62.53 ; C20.2@88.708,62 ccw(c88.708,65.343) 91.071,62.979 ; C20.2@88.708,62 ccw(c88.708,63.81) 89.987,62.53 ; C20.2@88.708,62 ccw(c88.708,65.343) 91.071,62.979 ; C20.2@88.708,62 ccw(c88.708,63.81) 89.987,62.53 ; C20.2@88.708,62 ccw(c88.708,65.343) 91.071,62.979 ; 89.052,52.705 cw(c86.644,50.296) L1.1@90.05,50.291 ; 89.052,52.705 cw(c86.644,50.296) L1.1@90.05,50.291 ; 89.052,52.705 cw(c86.644,50.296) L1.1@90.05,50.291 ; 89.052,52.705 89.052,56.363 ; 89.052,56.363 89.052,59.995 88.621,60.427 88.138,60.427 88.557,60.008 88.557,56.363 89.052,56.363 ; L1.1@89.777,51.178 cw(c89.496,49.33) L1.1@91.002,50.438 ; L1.1@89.777,51.178 cw(c89.496,49.33) L1.1@91.002,50.438 ; L1.1@89.777,51.178 cw(c89.496,49.33) L1.1@91.002,50.438 ; L1.1@89.833,51.105 ccw(c91.398,51.522) L1.1@90.691,50.065 ; L1.1@89.833,51.105 ccw(c91.398,51.522) L1.1@90.691,50.065 ; L1.1@89.833,51.105 ccw(c91.398,51.522) L1.1@90.691,50.065 ; L1.1@89.911,49.408 ccw(c90.799,50.297) L1.1@90.939,49.048 ; L1.1@89.911,49.408 ccw(c90.799,50.297) L1.1@90.939,49.048 ; L1.1@89.911,49.408 ccw(c90.799,50.297) L1.1@90.939,49.048 ; 91.948,64.469 cw(c92.822,64.469) pad.0@92.322,65.186 ; 91.948,64.469 cw(c92.822,64.469) pad.0@92.322,65.186 ; 91.948,64.469 cw(c92.822,64.469) pad.0@92.322,65.186 ; 92.75,63.692 pad.0@92.75,64.658 ; 92.75,63.692 93.447,64.389 93.447,64.735 pad.0@92.75,65.432 pad.0@92.75,64.658 ; 92.75,63.692 ccw(c91.696,64.746) pad.0@93.073,65.317 ; 92.75,63.692 ccw(c91.696,64.746) pad.0@93.073,65.317 ; 92.75,63.692 ccw(c91.696,64.746) pad.0@93.073,65.317 ; pad.0@93.138,65.22 cw(c92.392,64.474) 93.447,64.474 ; pad.0@93.138,65.22 cw(c92.392,64.474) 93.447,64.474 ; pad.0@93.138,65.22 cw(c92.392,64.474) 93.447,64.474
  other v1: 93.624,65.43 91.872,65.456
8.4V: C2.2 POWS.1 Q1.3 R21.1 U3.3 | length 327.3
  Top Layer w0.3: R21.1@108.571,92.761 108.839,92.761 111.028,94.95 ; R21.1@108.698,93.336 ccw(c108.815,93.737) 109.11,93.442 ccw(c109.5,93.052) R21.1@108.949,93.02 ; Q1.3@111.5,94.95 111.028,94.95 ; R21.1@108.6,93.05 ccw(c108.6,94.325) 109.502,93.423 ; R21.1@108.6,93.05 ccw(c108.6,94.325) 109.502,93.423 ; R21.1@108.6,93.05 ccw(c108.6,94.325) 109.502,93.423 ; R21.1@108.6,93.35 ccw(c108.6,95.349) 110.014,93.936 ; R21.1@108.6,93.35 ccw(c108.6,95.349) 110.014,93.936 ; R21.1@108.6,93.35 ccw(c108.6,95.349) 110.014,93.936 ; R21.1@108.643,92.975 cw(c109.747,92.337) 109.417,93.569 ; R21.1@108.643,92.975 cw(c109.747,92.337) 109.417,93.569 ; R21.1@108.643,92.975 cw(c109.747,92.337) 109.417,93.569 ; R21.1@108.775,93.303 ccw(c109.115,93.892) 109.291,93.235 ; R21.1@108.775,93.303 ccw(c109.115,93.892) 109.291,93.235 ; R21.1@108.775,93.303 ccw(c109.115,93.892) 109.291,93.235 ; R21.1@108.93,92.883 cw(c109.465,92.694) 109.318,93.242 ; R21.1@108.93,92.883 cw(c109.465,92.694) 109.318,93.242 ; R21.1@108.93,92.883 cw(c109.465,92.694) 109.318,93.242 ; 110.14,94.062 cw(c111.5,92.701) Q1.3@111.5,94.625 ; 110.14,94.062 cw(c111.5,92.701) Q1.3@111.5,94.625 ; 110.14,94.062 cw(c111.5,92.701) Q1.3@111.5,94.625 ; 110.652,94.574 cw(c111.5,93.725) Q1.3@111.5,94.925 ; 110.652,94.574 cw(c111.5,93.725) Q1.3@111.5,94.925 ; 110.652,94.574 cw(c111.5,93.725) Q1.3@111.5,94.925 ; 110.899,94.464 ccw(c110.643,95.42) Q1.3@111.5,94.925 ; 110.899,94.464 ccw(c110.643,95.42) Q1.3@111.5,94.925 ; 110.899,94.464 ccw(c110.643,95.42) Q1.3@111.5,94.925 ; 110.9,94.764 ccw(c110.773,95.24) Q1.3@111.225,95.044 ; 110.9,94.764 cw(c111.028,94.289) Q1.3@111.321,94.684 ; 110.9,94.764 ccw(c110.773,95.24) Q1.3@111.225,95.044 ; 110.9,94.764 cw(c111.028,94.289) Q1.3@111.321,94.684 ; 110.9,94.764 ccw(c110.773,95.24) Q1.3@111.225,95.044 ; 110.9,94.764 cw(c111.028,94.289) Q1.3@111.321,94.684 ; 111.028,94.95 ccw(c111.028,95.171) Q1.3@111.228,95.077 ; 111.028,94.95 cw(c111.028,94.729) Q1.3@111.228,94.823 ; 111.028,94.95 ccw(c111.028,95.171) Q1.3@111.228,95.077 ; 111.028,94.95 cw(c111.028,94.729) Q1.3@111.228,94.823 ; 111.028,94.95 ccw(c111.028,95.171) Q1.3@111.228,95.077 ; 111.028,94.95 cw(c111.028,94.729) Q1.3@111.228,94.823
  Top Layer w0.4: v1@122.25,72.746 122.452,72.746 122.795,72.746 ; v1@122.28,72.563 cw(c122.72,72.123) 122.72,72.746 ; v1@122.28,72.563 cw(c122.72,72.123) 122.72,72.746 ; v1@122.28,72.563 cw(c122.72,72.123) 122.72,72.746
  Top Layer w0.8: Q1.3@111.633,94.92 v2(114.193,94.92) ; v2(117.577,96.977) 118.008,97.409 ; v1(122.174,72.669) 122.453,72.873 122.452,72.746 122.452,72.667 122.441,71.347 122.43,70.077 122.43,68.989 123.088,69.647 123.088,72.452 ; 122.25,75.286 122.25,73.29 122.795,72.746 123.088,72.452 ; v2@117.586,96.918 ccw(c117.512,97.409) 118.008,97.409 ; v2@117.586,96.918 ccw(c117.512,97.409) 118.008,97.409 ; v2@117.586,96.918 ccw(c117.512,97.409) 118.008,97.409 ; v2@117.619,96.935 ccw(c116.679,97.875) v2@118.008,97.875 ; v2@117.619,96.935 ccw(c116.679,97.875) v2@118.008,97.875 ; v2@117.619,96.935 ccw(c116.679,97.875) v2@118.008,97.875 ; v2@117.77,97.17 ccw(c117.048,97.892) v2@118.068,97.892 ; v2@117.77,97.17 ccw(c117.048,97.892) v2@118.068,97.892 ; v2@117.77,97.17 ccw(c117.048,97.892) v2@118.068,97.892 ; 118.008,97.409 ccw(c117.72,97.697) v2@118.058,97.925 ; 118.008,97.409 ccw(c117.72,97.697) v2@118.058,97.925 ; 118.008,97.409 ccw(c117.72,97.697) v2@118.058,97.925 ; 118.008,97.409 118.008,100.358 ; 118.008,98.555 cw(c119.245,98.555) C2.2@118.371,99.429 ; 118.008,98.555 cw(c119.245,98.555) C2.2@118.371,99.429 ; 118.008,98.555 cw(c119.245,98.555) C2.2@118.371,99.429 ; 118.008,100.358 ccw(c119.045,100.358) C2.2@118.366,99.576 ; 118.008,100.358 ccw(c119.045,100.358) C2.2@118.366,99.576 ; 118.008,100.358 ccw(c119.045,100.358) C2.2@118.366,99.576 ; 118.008,100.358 U3.3@119.2,101.55 ; C2.2@118.499,99.512 cw(c120.936,99.814) U3.3@119.2,101.55 ; C2.2@118.499,99.512 cw(c120.936,99.814) U3.3@119.2,101.55 ; C2.2@118.499,99.512 cw(c120.936,99.814) U3.3@119.2,101.55 ; v1@122.163,72.718 cw(c122.385,71.748) 123.088,72.452 ; v1@122.163,72.718 cw(c122.385,71.748) 123.088,72.452 ; v1@122.163,72.718 cw(c122.385,71.748) 123.088,72.452 ; v1@122.209,68.824 ccw(c121.676,69.357) 122.43,69.357 ; v1@122.209,68.824 ccw(c121.676,69.357) 122.43,69.357 ; v1@122.209,68.824 ccw(c121.676,69.357) 122.43,69.357 ; v1@122.21,72.704 cw(c121.62,72.124) 122.447,72.117 ; v1@122.21,72.704 cw(c121.62,72.124) 122.447,72.117 ; v1@122.21,72.704 cw(c121.62,72.124) 122.447,72.117 ; v1@122.234,70.043 ccw(c121.766,70.519) 122.434,70.513 ; v1@122.234,70.043 ccw(c121.766,70.519) 122.434,70.513 ; v1@122.234,70.043 ccw(c121.766,70.519) 122.434,70.513 ; v1@122.235,70.114 cw(c121.763,69.642) 122.43,69.642 ; v1@122.235,70.114 cw(c121.763,69.642) 122.43,69.642 ; v1@122.235,70.114 cw(c121.763,69.642) 122.43,69.642 ; v1@122.234,71.313 ccw(c121.741,71.814) 122.445,71.809 ; v1@122.234,71.313 ccw(c121.741,71.814) 122.445,71.809 ; v1@122.234,71.313 ccw(c121.741,71.814) 122.445,71.809 ; v1@122.235,71.384 cw(c121.734,70.89) 122.437,70.885 ; v1@122.235,71.384 cw(c121.734,70.89) 122.437,70.885 ; v1@122.235,71.384 cw(c121.734,70.89) 122.437,70.885
  Top Layer w1: POWS.1@120.117,74.409 POWS.1@119.939,74.587 ; 120.303,73.822 POWS.1@120.303,74.223 ; POWS.1@121.234,75.108 121.412,75.286 ; 121.945,75.196 121.945,75.286 ; v1@122.25,68.936 122.047,68.732 120.167,68.732 119.939,68.961 ; 119.939,68.882 cw(c121.745,68.882) v1@120.468,70.159 ; 119.939,68.882 cw(c121.745,68.882) v1@120.468,70.159 ; 119.939,68.882 cw(c121.745,68.882) v1@120.468,70.159 ; 119.939,68.961 ccw(c120.55,69.572) v1@120.609,68.71 ; 119.939,68.961 ccw(c120.55,69.572) v1@120.609,68.71 ; 119.939,68.961 ccw(c120.55,69.572) v1@120.609,68.71 ; 119.939,68.961 POWS.1@119.939,74.587 ; 119.939,70.092 ccw(c121.831,70.092) v1@120.493,68.753 ; 119.939,70.092 ccw(c121.831,70.092) v1@120.493,68.753 ; 119.939,70.092 ccw(c121.831,70.092) v1@120.493,68.753 ; 119.939,70.152 cw(c121.745,70.152) v1@120.468,71.429 ; 119.939,70.152 cw(c121.745,70.152) v1@120.468,71.429 ; 119.939,70.152 cw(c121.745,70.152) v1@120.468,71.429 ; 119.939,71.224 ccw(c121.745,71.224) v1@120.468,69.947 ; 119.939,71.224 ccw(c121.745,71.224) v1@120.468,69.947 ; 119.939,71.224 ccw(c121.745,71.224) v1@120.468,69.947 ; 119.939,71.534 cw(c121.658,71.534) v1@120.442,72.75 ; 119.939,71.534 cw(c121.658,71.534) v1@120.442,72.75 ; 119.939,71.534 cw(c121.658,71.534) v1@120.442,72.75 ; 119.939,72.494 ccw(c121.745,72.494) v1@120.468,71.217 ; 119.939,72.494 ccw(c121.745,72.494) v1@120.468,71.217 ; 119.939,72.494 ccw(c121.745,72.494) v1@120.468,71.217 ; 119.939,73.238 cw(c122.028,73.238) POWS.1@120.551,74.715 ; 119.939,73.238 cw(c122.028,73.238) POWS.1@120.551,74.715 ; 119.939,73.238 cw(c122.028,73.238) POWS.1@120.551,74.715 ; 119.939,73.754 ccw(c121.658,73.754) v1@120.442,72.538 ; 119.939,73.754 ccw(c121.658,73.754) v1@120.442,72.538 ; 119.939,73.754 ccw(c121.658,73.754) v1@120.442,72.538 ; POWS.1@119.939,74.587 119.939,75.057 120.167,75.286 121.412,75.286 ; 120.08,73.899 ccw(c119.19,74.413) POWS.1@120.142,74.798 ; 120.08,73.899 ccw(c119.19,74.413) POWS.1@120.142,74.798 ; 120.08,73.899 ccw(c119.19,74.413) POWS.1@120.142,74.798 ; 120.303,74.116 cw(c121.15,74.116) POWS.1@120.551,74.715 ; 120.303,74.116 cw(c121.15,74.116) POWS.1@120.551,74.715 ; 120.303,74.116 cw(c121.15,74.116) POWS.1@120.551,74.715 ; POWS.1@120.985,74.758 cw(c121.945,74.148) 121.945,75.286 ; POWS.1@120.985,74.758 cw(c121.945,74.148) 121.945,75.286 ; POWS.1@120.985,74.758 cw(c121.945,74.148) 121.945,75.286 ; 121.412,75.286 121.945,75.286
  Bottom Layer w0.8: v2(114.193,94.92) 116.25,96.977 v2(117.577,96.977) ; 116.738,96.977 v2(117.577,96.977) ; v1(120.574,71.323) 120.675,71.323 122.009,72.657 v1@122.174,72.657 ; v1(122.174,72.669) v1@122.174,72.657 ; v2(117.577,96.977) 118.008,97.409 ; v2@117.586,96.918 ccw(c117.512,97.409) 118.008,97.409 ; v2@117.586,96.918 ccw(c117.512,97.409) 118.008,97.409 ; v2@117.586,96.918 ccw(c117.512,97.409) 118.008,97.409 ; v2@117.619,96.935 ccw(c116.679,97.875) v2@118.008,97.875 ; v2@117.619,96.935 ccw(c116.679,97.875) v2@118.008,97.875 ; v2@117.619,96.935 ccw(c116.679,97.875) v2@118.008,97.875 ; v2@117.77,97.17 ccw(c117.048,97.892) v2@118.068,97.892 ; v2@117.77,97.17 ccw(c117.048,97.892) v2@118.068,97.892 ; v2@117.77,97.17 ccw(c117.048,97.892) v2@118.068,97.892 ; 118.008,97.409 ccw(c117.72,97.697) v2@118.058,97.925 ; 118.008,97.409 ccw(c117.72,97.697) v2@118.058,97.925 ; 118.008,97.409 ccw(c117.72,97.697) v2@118.058,97.925 ; 118.008,97.409 v2(118.008,97.892) 120.946,97.892 122.762,96.076 122.762,76.686 121.828,75.753 122.098,75.483 ; 119.837,68.715 cw(c121.535,68.715) v1@120.545,70.094 ; 119.837,68.715 cw(c121.535,68.715) v1@120.545,70.094 ; 119.837,68.715 cw(c121.535,68.715) v1@120.545,70.094 ; 119.837,68.936 ccw(c120.312,69.41) v1@120.622,68.815 ; 119.837,68.936 ccw(c120.312,69.41) v1@120.622,68.815 ; 119.837,68.936 ccw(c120.312,69.41) v1@120.622,68.815 ; 119.837,68.936 119.837,75.057 120.263,75.483 122.098,75.483 ; 119.837,68.936 120.117,68.656 122.149,68.656 123.114,69.621 123.114,72.339 ; 119.837,69.666 cw(c122.231,69.666) v1@120.538,71.359 ; 119.837,69.666 cw(c122.231,69.666) v1@120.538,71.359 ; 119.837,69.666 cw(c122.231,69.666) v1@120.538,71.359 ; 119.837,71.048 cw(c122.145,71.048) v1@120.513,72.679 ; 119.837,71.048 cw(c122.145,71.048) v1@120.513,72.679 ; 119.837,71.048 cw(c122.145,71.048) v1@120.513,72.679 ; 119.837,71.711 ccw(c122.231,71.711) v1@120.538,70.018 ; 119.837,71.711 ccw(c122.231,71.711) v1@120.538,70.018 ; 119.837,71.711 ccw(c122.231,71.711) v1@120.538,70.018 ; 119.837,72.751 cw(c122.515,72.751) POWS.1@120.621,74.644 ; 119.837,72.751 cw(c122.515,72.751) POWS.1@120.621,74.644 ; 119.837,72.751 cw(c122.515,72.751) POWS.1@120.621,74.644 ; 119.837,72.981 ccw(c122.231,72.981) v1@120.538,71.288 ; 119.837,72.981 ccw(c122.231,72.981) v1@120.538,71.288 ; 119.837,72.981 ccw(c122.231,72.981) v1@120.538,71.288 ; 119.837,74.24 ccw(c122.145,74.24) v1@120.513,72.609 ; 119.837,74.24 ccw(c122.145,74.24) v1@120.513,72.609 ; 119.837,74.24 ccw(c122.145,74.24) v1@120.513,72.609 ; 120.026,73.613 ccw(c118.998,74.207) POWS.1@120.061,74.736 ; 120.026,73.613 ccw(c118.998,74.207) POWS.1@120.061,74.736 ; 120.026,73.613 ccw(c118.998,74.207) POWS.1@120.061,74.736 ; 120.229,68.656 ccw(c120.229,69.229) v1@120.635,68.824 ; 120.229,68.656 ccw(c120.229,69.229) v1@120.635,68.824 ; 120.229,68.656 ccw(c120.229,69.229) v1@120.635,68.824 ; v1@120.564,68.824 ccw(c120.969,69.229) 120.969,68.656 ; v1@120.564,68.824 ccw(c120.969,69.229) 120.969,68.656 ; v1@120.564,68.824 ccw(c120.969,69.229) 120.969,68.656 ; POWS.1@121.105,74.777 cw(c122.098,74.432) 122.098,75.483 ; POWS.1@121.105,74.777 cw(c122.098,74.432) 122.098,75.483 ; POWS.1@121.105,74.777 cw(c122.098,74.432) 122.098,75.483 ; 121.804,68.656 ccw(c121.804,69.229) v1@122.209,68.824 ; 121.804,68.656 ccw(c121.804,69.229) v1@122.209,68.824 ; 121.804,68.656 ccw(c121.804,69.229) v1@122.209,68.824 ; 122.098,73.355 cw(c121.658,72.916) v1@122.219,72.648 ; 122.098,73.355 cw(c121.658,72.916) v1@122.219,72.648 ; 122.098,73.355 cw(c121.658,72.916) v1@122.219,72.648 ; 122.098,73.355 122.098,75.483 ; 122.098,73.355 122.796,72.657 ; v1@122.124,68.859 cw(c123.107,68.859) 122.412,69.555 ; v1@122.124,68.859 cw(c123.107,68.859) 122.412,69.555 ; v1@122.124,68.859 cw(c123.107,68.859) 122.412,69.555 ; v1@122.145,72.71 cw(c122.439,72.3) 122.796,72.657 ; v1@122.145,72.71 cw(c122.439,72.3) 122.796,72.657 ; v1@122.145,72.71 cw(c122.439,72.3) 122.796,72.657 ; v1@122.145,72.71 cw(c122.439,72.3) 122.796,72.657 ; v1@122.145,72.71 cw(c122.439,72.3) 122.796,72.657 ; v1@122.145,72.71 cw(c122.439,72.3) 122.796,72.657 ; v1@122.173,72.719 cw(c122.196,71.421) 123.114,72.339 ; v1@122.173,72.719 cw(c122.196,71.421) 123.114,72.339 ; v1@122.173,72.719 cw(c122.196,71.421) 123.114,72.339 ; 122.174,69.317 ccw(c121.739,69.751) v1@122.24,70.108 ; 122.174,69.317 ccw(c121.739,69.751) v1@122.24,70.108 ; 122.174,69.317 ccw(c121.739,69.751) v1@122.24,70.108 ; 122.174,69.317 v1@122.174,72.657 ; 122.174,69.317 122.796,69.939 122.796,72.657 ; v1@122.174,72.657 122.796,72.657 ; v1@122.178,72.719 cw(c122.122,72.047) 122.796,72.047 ; v1@122.178,72.719 cw(c122.122,72.047) 122.796,72.047 ; v1@122.178,72.719 cw(c122.122,72.047) 122.796,72.047 ; v1@122.209,72.705 cw(c120.792,71.288) 122.796,71.288 ; v1@122.209,72.705 cw(c120.792,71.288) 122.796,71.288 ; v1@122.209,72.705 cw(c120.792,71.288) 122.796,71.288 ; v1@122.235,70.043 ccw(c120.879,71.399) 122.796,71.399 ; v1@122.235,70.043 ccw(c120.879,71.399) 122.796,71.399 ; v1@122.235,70.043 ccw(c120.879,71.399) 122.796,71.399 ; v1@122.235,71.313 ccw(c120.909,72.657) 122.796,72.657 ; v1@122.235,71.313 ccw(c120.909,72.657) 122.796,72.657 ; v1@122.235,71.313 ccw(c120.909,72.657) 122.796,72.657 ; v1@122.235,71.384 cw(c120.879,70.028) 122.796,70.028 ; v1@122.235,71.384 cw(c120.879,70.028) 122.796,70.028 ; v1@122.235,71.384 cw(c120.879,70.028) 122.796,70.028 ; 122.796,72.657 123.114,72.339
  Bottom Layer w1: POWS.1@120.091,74.409 POWS.1@120.574,74.892 ; POWS.1@121.082,75.235 POWS.1@121.209,75.108 ; POWS.1@121.412,75.108 121.564,75.26 ; 121.92,73.177 121.92,75.286 ; POWS.1@120.681,74.66 cw(c119.949,72.83) v1@121.92,72.83 ; POWS.1@120.681,74.66 cw(c119.949,72.83) v1@121.92,72.83 ; POWS.1@120.681,74.66 cw(c119.949,72.83) v1@121.92,72.83 ; POWS.1@120.87,75.123 ccw(c121.114,75.71) 121.564,75.26 ; POWS.1@120.87,75.123 ccw(c121.114,75.71) 121.564,75.26 ; POWS.1@120.87,75.123 ccw(c121.114,75.71) 121.564,75.26 ; POWS.1@121.022,74.923 ccw(c122.367,75.091) 121.555,74.006 ; POWS.1@121.022,74.923 ccw(c122.367,75.091) 121.555,74.006 ; POWS.1@121.022,74.923 ccw(c122.367,75.091) 121.555,74.006 ; 121.053,75.588 cw(c120.54,74.307) 121.92,74.307 ; 121.053,75.588 cw(c120.54,74.307) 121.92,74.307 ; 121.053,75.588 cw(c120.54,74.307) 121.92,74.307 ; 121.92,72.92 ccw(c122.425,72.92) v1@122.068,72.563 ; 121.92,72.92 ccw(c122.425,72.92) v1@122.068,72.563 ; 121.92,72.92 ccw(c122.425,72.92) v1@122.068,72.563 ; 121.92,72.92 ccw(c122.425,72.92) v1@122.068,72.563 ; 121.92,72.92 ccw(c122.425,72.92) v1@122.068,72.563 ; 121.92,72.92 ccw(c122.425,72.92) v1@122.068,72.563
  other v1: 120.599,68.859 122.174,68.859 120.574,70.053 122.199,70.079 122.199,71.349 120.548,72.644
8V: 